# EAGLE board BLDC_schematic_v3 (EAGLE 9.6.2)

Size 115.57 x 77.48 mm. Coordinates in mm from the lower left corner, seen from the top.
Outline: 0,0.01 115.57,0 115.57,77.48 0,77.47 0,0.01
Copper layers (1*16): Top 0.035mm / dielectric 1.5mm / Bottom 0.035mm
Design rules "default": minimum track width 6mil, minimum drill 0.35mm, track to track 6mil, track to pad 6mil, pad to pad 6mil, via to via 6mil, smd to smd 6mil, copper to edge 40mil, drill to drill 6mil, minimum pad ring 10mil, minimum via ring 8mil, stop-mask expansion 4mil, vias tented up to drill 0mil, thermal gap 10mil
Net classes: 0 default: clearance 0.205 mm

## Footprints (pad centres in the part's own frame; a part is rotated, then mirrored left to right if it is on the bottom)
C025-030X050 = drill 0.813 octagon: 1 -1.27,0; 2 1.27,0
TT5D11 = drill 0.813: + -2.54,0 | drill 0.813 octagon: - 2.54,0
DO15-12 = drill 1.118 long: A 6.35,0; C -6.35,0
DO201-15 = drill 1.499 long: A 7.62,0; C -7.62,0
SHK20Q = drill 1.5 pad 3.81 octagon: 1A -7.874,2.54; 1B -7.874,-2.54; 2A 7.874,2.54; 2B 7.874,-2.54
5-2,5 = smd 2.54 x 5.08: 1 0,0
MCS08 = drill 1.194 pad 2.159 octagon: MP 0,0
TO220V = drill 1.016 long: 1 -2.54,-2.54; 2 0,-2.54; 3 2.54,-2.54
INFINEON_IRFB3077PBF_0 = drill 1.2 pad 1.85 square: 1 -0.705,2.54 | drill 1.2 pad 1.85: 2 -0.705,0; 3 -0.705,-2.54
0207/10 = drill 0.813 octagon: 1 -5.08,0; 2 5.08,0
0204/7 = drill 0.813 octagon: 1 -3.81,0; 2 3.81,0
MODULE_ESP32_DEVKIT_V1 = drill 1.02 pad 2 square: 1 -12.7,15.515 | drill 1.02 pad 2: 2 -12.7,12.975; 3 -12.7,10.435; 4 -12.7,7.895; 5 -12.7,5.355; 6 -12.7,2.815; 7 -12.7,0.275; 8 -12.7,-2.265; 9 -12.7,-4.805; 10 -12.7,-7.345; 11 -12.7,-9.885; 12 -12.7,-12.425; 13 -12.7,-14.965; 14 -12.7,-17.505; 15 -12.7,-20.045; 16 12.7,-20.045; 17 12.7,-17.505; 18 12.7,-14.965; 19 12.7,-12.425; 20 12.7,-9.885; 21 12.7,-7.345; 22 12.7,-4.805; 23 12.7,-2.265; 24 12.7,0.275; 25 12.7,2.815; 26 12.7,5.355; 27 12.7,7.895; 28 12.7,10.435; 29 12.7,12.975; 30 12.7,15.515 | hole 3: -12.28,-23.475; 12.23,-23.475; 12.23,23.475; -12.28,23.475
DIP762W45P254L1092H533Q8 = drill 0.83 square: 1 -3.81,3.81 | drill 0.83: 2 -3.81,1.27; 3 -3.81,-1.27; 4 -3.81,-3.81; 5 3.81,-3.81; 6 3.81,-1.27; 7 3.81,1.27; 8 3.81,3.81
AK500/2-H = drill 1.321 long: 1 -2.515,0; 2 2.515,0

## Placement (x,y rotation side)
C1  [C025-030X050]  13.03,63.51 0 top
C2  [C025-030X050]  20.65,45.73 180 top
C3  [C025-030X050]  47.32,34.3 0 top
C4  [C025-030X050]  40.97,34.3 0 top
C5  [C025-030X050]  75.26,39.38 0 top
C6  [C025-030X050]  68.91,39.38 0 top
C7  [TT5D11]  51.13,7.63 270 top
C8  [TT5D11]  38.43,7.63 270 top
C9  [TT5D11]  25.73,7.63 270 top
C10  [C025-030X050]  9.22,27.95 0 top
C11  [C025-030X050]  -16.18,104.15 0 top  (outside the outline)
C12  [C025-030X050]  -22.53,104.15 0 top  (outside the outline)
C13  [C025-030X050]  -28.88,104.15 0 top  (outside the outline)
D1  1N5060GP  [DO15-12]  11.76,52.08 0 top
D2  1N5060GP  [DO15-12]  32.08,53.35 0 top
D3  1N5060GP  [DO15-12]  -39.04,97.8 0 top  (outside the outline)
D4  1N5400  [DO201-15]  -65.71,86.37 0 top  (outside the outline)
F1  [SHK20Q]  98.12,6.36 0 top
F2  [SHK20Q]  24.46,24.14 0 top
GNDBAT_PAD1  WIREPADSMD5-2,5  [5-2,5]  4.14,5.09 0 top
HALL_5V_PAD  MCS08  [MCS08]  -41.58,110.5 0 top  (outside the outline)
HALL_A_PAD  MCS08  [MCS08]  -66.98,110.5 0 top  (outside the outline)
HALL_B_PAD  MCS08  [MCS08]  -79.68,110.5 0 top  (outside the outline)
HALL_C_PAD  MCS08  [MCS08]  -54.28,110.5 0 top  (outside the outline)
HALL_GND_PAD  MCS08  [MCS08]  -27.61,110.5 0 top  (outside the outline)
IC1  788TV  [TO220V]  -49.2,91.45 0 top  (outside the outline)
Q1  INFINEON_IRFB3077PBFINFINEON_IRFB3077PBF_0_0  [INFINEON_IRFB3077PBF_0]  11.76,69.86 90 top
Q2  INFINEON_IRFB3077PBFINFINEON_IRFB3077PBF_0_0  [INFINEON_IRFB3077PBF_0]  24.46,69.86 90 top
Q3  INFINEON_IRFB3077PBFINFINEON_IRFB3077PBF_0_0  [INFINEON_IRFB3077PBF_0]  39.7,69.86 90 top
Q4  INFINEON_IRFB3077PBFINFINEON_IRFB3077PBF_0_0  [INFINEON_IRFB3077PBF_0]  52.4,69.86 90 top
Q5  INFINEON_IRFB3077PBFINFINEON_IRFB3077PBF_0_0  [INFINEON_IRFB3077PBF_0]  67.64,69.86 90 top
Q6  INFINEON_IRFB3077PBFINFINEON_IRFB3077PBF_0_0  [INFINEON_IRFB3077PBF_0]  80.34,69.86 90 top
R1  100  [0207/10]  9.22,62.24 90 top
R2  100  [0207/10]  21.92,60.97 90 top
R3  100  [0207/10]  65.1,62.24 0 top
R4  100  [0207/10]  52.4,62.24 0 top
R5  100  [0207/10]  39.7,62.24 0 top
R6  100  [0207/10]  76.53,50.81 0 top
R7  [0204/7]  43.51,39.38 0 top
R8  [0204/7]  -18.72,120.66 0 top  (outside the outline)
R9  [0204/7]  -28.88,120.66 0 top  (outside the outline)
R10  [0204/7]  -39.04,120.66 0 top  (outside the outline)
R11  [0204/7]  -49.2,120.66 0 top  (outside the outline)
R12  [0204/7]  -59.36,120.66 0 top  (outside the outline)
THROTTLE_GND_PAD  MCS08  [MCS08]  -50.47,104.15 0 top  (outside the outline)
THROTTLE_IN_PAD  MCS08  [MCS08]  -69.52,104.15 0 top  (outside the outline)
THTTLE_5V_PAD  MCS08  [MCS08]  -86.03,104.15 0 top  (outside the outline)
U1  ESP32-DEVKIT-V1  [MODULE_ESP32_DEVKIT_V1]  98.12,27.95 180 top
U2  IR2183  [DIP762W45P254L1092H533Q8]  9.22,43.19 90 top
U3  IR2183  [DIP762W45P254L1092H533Q8]  48.59,50.81 0 top
U4  IR2183  [DIP762W45P254L1092H533Q8]  65.1,52.08 180 top
VBAT_PAD  WIREPADSMD5-2,5  [5-2,5]  4.14,13.98 0 top
X1  [AK500/2-H]  98.12,53.35 0 top
X2  [AK500/2-H]  98.12,39.38 0 top

## Library data of the parts
C1-C13 = rcl; SPICEPREFIX: C
D1-D4 = diode
F1 F2 = fuse; OC_FARNELL: unknown; OC_NEWARK: unknown
GNDBAT_PAD1 VBAT_PAD = wirepad
HALL_5V_PAD HALL_A_PAD HALL_B_PAD HALL_C_PAD HALL_GND_PAD THROTTLE_GND_PAD THROTTLE_IN_PAD THTTLE_5V_PAD = solpad
IC1 = linear
Q1-Q6 = Infineon - IRFB3077PBF; AUTOMOTIVE: No; CENTROID_NOT_SPECIFIED: No; CONTINUOUS_DRAIN_CURRENT: 210A; DATASHEET: https://www.infineon.com/dgdl/Infineon-IRFB3077-DataSheet-v01_01-EN.pdf?fileId=5546d462533600a4015356153f0d1def; DEPLETION_MODE: False; DEVICE_CLASS_L1: Discrete Semiconductors; DEVICE_CLASS_L2: Transistors; DEVICE_CLASS_L3: MOSFETs; DIGIKEY_DESCRIPTION: MOSFET N-CH 75V 120A TO220AB; DIGIKEY_PART_NUMBER: IRFB3077PBF-ND; DRAIN_TO_SOURCE_BREAKDOWN_VOLTAGE: 75V; DRAIN_TO_SOURCE_RESISTANCE: 2.8mΩ; DRAIN_TO_SOURCE_VOLTAGE: 75V; FOOTPRINT_URL: https://www.infineon.com/cms/en/product/packages/PG-TO220/PG-TO220-3-904/; FOOTPRINT_VARIANT_NAME_0: Recommended_Land_Pattern; GATE_CHARGE_AT_VGS: 160nC @ 10V; GATE_TO_SOURCE_VOLTAGE: 20V; HEIGHT: 19.15mm; INPUT_CAPACITACE_AT_VDS: 9400pF @ 50V; LEAD_FREE: Yes; MAX_FORWARD_DIODE_VOLTAGE: 1.3V; MAX_JUNCTION_TEMP: +175°C; MF: Infineon; MFG_PACKAGE_IDENT: PG-TO220-3; MFG_PACKAGE_IDENT_COMPONENT_ID: 23a5373a371ebf18; MFG_PACKAGE_IDENT_DATE: 0; MFG_PACKAGE_IDENT_REV: 904; MOUSER_PART_NUMBER: 942-IRFB3077PBF; MPN: IRFB3077PBF; NUMBER_OF_CHANNELS: 1; NUMBER_OF_N_CHANNELS: 1; PACKAGE: TO-220AB; POWER_DISSIPATION: 370W; PREFIX: Q; PULSE_DRAIN_CURRENT: 850A; REVERSE_RECOVERY_CHARGE: 59nC; REVERSE_RECOVERY_TIME: 42ns; ROHS: Yes; RTHJA_MAX: 62°C/W; STANDOFF_HEIGHT: 3.56mm; TECHNOLOGY: NA; TEMPERATURE_RANGE_HIGH: +175°C; TEMPERATURE_RANGE_LOW: -55°C; THRESHOLD_VGS_MAX: 4V; THRESHOLD_VGS_MIN: 2V; TURN_OFF_DELAY_TIME: 69ns; TURN_ON_DELAY_TIME: 25ns; VERIFICATION_VERSION: 0.0.0.3
R1-R12 = rcl; SPICEPREFIX: R
U1 = ESP32-DEVKIT-V1; AVAILABILITY: Not in stock; DESCRIPTION: Dual core, Wi-Fi: 2.4 GHz up to 150 Mbits/s,BLE (Bluetooth Low Energy) and legacy Bluetooth, 32 bits, Up to 240 MHz; MF: Do it; MP: ESP32-DEVKIT-V1; PACKAGE: None; PRICE: None
U2-U4 = IR2183; AVAILABILITY: In Stock; DESCRIPTION: Half-Bridge Gate Driver IC Inverting, Non-Inverting 14-SOIC; MF: Infineon; MP: IR2183; PACKAGE: DIP-8 International Rectifier; PRICE: None; PURCHASE-URL: https://pricing.snapeda.com/search/part/IR2183/?ref=eda
X1 X2 = con-ptr500; OC_FARNELL: unknown; OC_NEWARK: unknown

## Nets
GND: C2.1 C3.1 C4.2 C7.- C8.- C9.- C10.2 C12.2 C13.2 D4.A GNDBAT_PAD1.1 HALL_GND_PAD.MP Q2.3 Q4.3 Q6.3 THROTTLE_GND_PAD.MP U1.2 U1.29 U2.3 U3.3 U4.3 X1.1 X2.2
HALL_A: C13.1 R9.2 U1.27
HALL_B: C12.1 R8.2 U1.26
HALL_C: C10.1 R7.2 U1.25
HIN_1: U1.24 U2.1
HIN_2: U1.23 U3.1
HIN_3: U1.22 U4.1
HO_1: R1.1 U2.7
HO_2: R3.1 U3.7
HO_3: R5.1 U4.7
LIN_1: U1.21 U2.2
LIN_2: U1.20 U3.2
LIN_3: U1.19 U4.2
LO_1: R2.1 U2.4
LO_2: R4.1 U3.4
LO_3: R6.1 U4.4
N$1: C6.1 D2.C U3.8
N$2: C5.1 D3.C U4.8
N$3: C1.1 D1.C U2.8
N$4: C11.2 IC1.2
N$5: F1.2A X1.2
N$6: Q3.1 R3.2
N$7: Q1.1 R1.2
N$8: Q2.1 R2.2
N$9: Q4.1 R4.2
N$10: F2.1A
N$11: Q5.1 R5.2
N$12: Q6.1 R6.2
N$13: F2.2A IC1.1
N$14: HALL_A_PAD.MP R9.1 R12.1
N$15: HALL_B_PAD.MP R8.1 R11.1
N$16: HALL_C_PAD.MP R7.1 R10.1
N$17: F1.1A
N$21: R11.2
N$22: R12.2
PHASE_1: C1.2 Q1.3 Q2.2 U2.6
PHASE_2: C6.2 Q3.3 Q4.2 U3.6
PHASE_3: C5.2 Q5.3 Q6.2 U4.6
RAW_VCC: C7.+ C8.+ C9.+ D4.C Q1.2 Q3.2 Q5.2 VBAT_PAD.1
THROTTLE: THROTTLE_IN_PAD.MP U1.28
VCC_5V: C11.1 HALL_5V_PAD.MP IC1.3 R10.2 THTTLE_5V_PAD.MP U1.30
VCC_15V: C2.2 C3.2 C4.1 D1.A D2.A D3.A U2.5 U3.5 U4.5 X2.1

## Tracks (layer width: path | path; a pad name or v marks a point on that pad's centre or on a via)
GND  (22 unrouted)
HALL_A  (2 unrouted)
HALL_B  (2 unrouted)
HALL_C  (2 unrouted)
HIN_1  (1 unrouted)
HIN_2  (1 unrouted)
HIN_3  (1 unrouted)
HO_1  (1 unrouted)
HO_2  (1 unrouted)
HO_3  (1 unrouted)
LIN_1  (1 unrouted)
LIN_2  (1 unrouted)
LIN_3  (1 unrouted)
LO_1  (1 unrouted)
LO_2  (1 unrouted)
LO_3  (1 unrouted)
N$1  (2 unrouted)
N$2  (2 unrouted)
N$3  (2 unrouted)
N$4  (1 unrouted)
N$5  (1 unrouted)
N$6  (1 unrouted)
N$7  (1 unrouted)
N$8  (1 unrouted)
N$9  (1 unrouted)
N$11  (1 unrouted)
N$12  (1 unrouted)
N$13  (1 unrouted)
N$14  (2 unrouted)
N$15  (2 unrouted)
N$16  (2 unrouted)
PHASE_1  (3 unrouted)
PHASE_2  (3 unrouted)
PHASE_3  (3 unrouted)
RAW_VCC  (7 unrouted)
THROTTLE  (1 unrouted)
VCC_5V  (5 unrouted)
VCC_15V  (9 unrouted)